# EAGLE board 2_21_23 Homework MMC Robotics (EAGLE 9.7.0)

Size 31.28 x 56.25 mm. Coordinates in mm from the lower left corner, seen from the top.
Outline: 0,0 31.27,0 31.27,56.25 0,56.25 0,0
Copper layers (1*16): Top 0.035mm / dielectric 1.5mm / Bottom 0.035mm
Design rules "default": minimum track width 6mil, minimum drill 0.35mm, track to track 6mil, track to pad 6mil, pad to pad 6mil, via to via 6mil, smd to smd 6mil, copper to edge 40mil, drill to drill 6mil, minimum pad ring 10mil, minimum via ring 8mil, stop-mask expansion 4mil, vias tented up to drill 0mil, thermal gap 10mil

## Footprints (pad centres in the part's own frame; a part is rotated, then mirrored left to right if it is on the bottom)
BAT_3002 = smd 3.96 x 3.96: N 0,0.65 | smd 5.08 x 5.08: P 12.825,0.65; P1 -12.825,0.65
LED-RGB-5MM = drill 0.9: B 0.635,0.635; C -0.635,-0.635; G 1.905,-0.635; R -1.905,0.635

## Placement (x,y rotation side)
BAT1  BR2016  [BAT_3002]  15.85,36.06 90 top
D2  LED-RGBRCBG-PTH  [LED-RGB-5MM]  5.78,7.49 0 top

## Library data of the parts
BAT1 = Tinkercad; CATEGORY: Battery-Holder; CELL_DIAMETER: 20mm; DESCRIPTION: Battery Retainer Coin, 20.0mm 1 Cell SMD (SMT) Tab; MANUFACTURER: Keystone Electronics; MPN: 3002; PART_STATUS: ACTIVE; ROHS_COMPLIANT: COMPLIANT; SERIES: -; SUB_CATEGORY: Holder; TYPE: Coin Cell
D2 = Tinkercad

## Nets
BAT1+: BAT1.P BAT1.P1 D2.B D2.R
BAT1-: BAT1.N D2.C D2.G

## Tracks (layer width: path | path; a pad name or v marks a point on that pad's centre or on a via)
BAT1+  (3 unrouted)
BAT1-  (2 unrouted)